# Altium PCB Силовая плата.PcbDoc (part 1 of 2)
Units mm, origin at the board's own origin, x right, y up, seen from the top; angles counter-clockwise.
Board outline 67 x 90.45 mm, 6 copper layers (F.Cu, In1.Cu, In2.Cu, In3.Cu, In4.Cu, B.Cu); 79 components, 15 nets, 212 pads, 347 vias.
Unrouted connection lines stored in the file: 1.
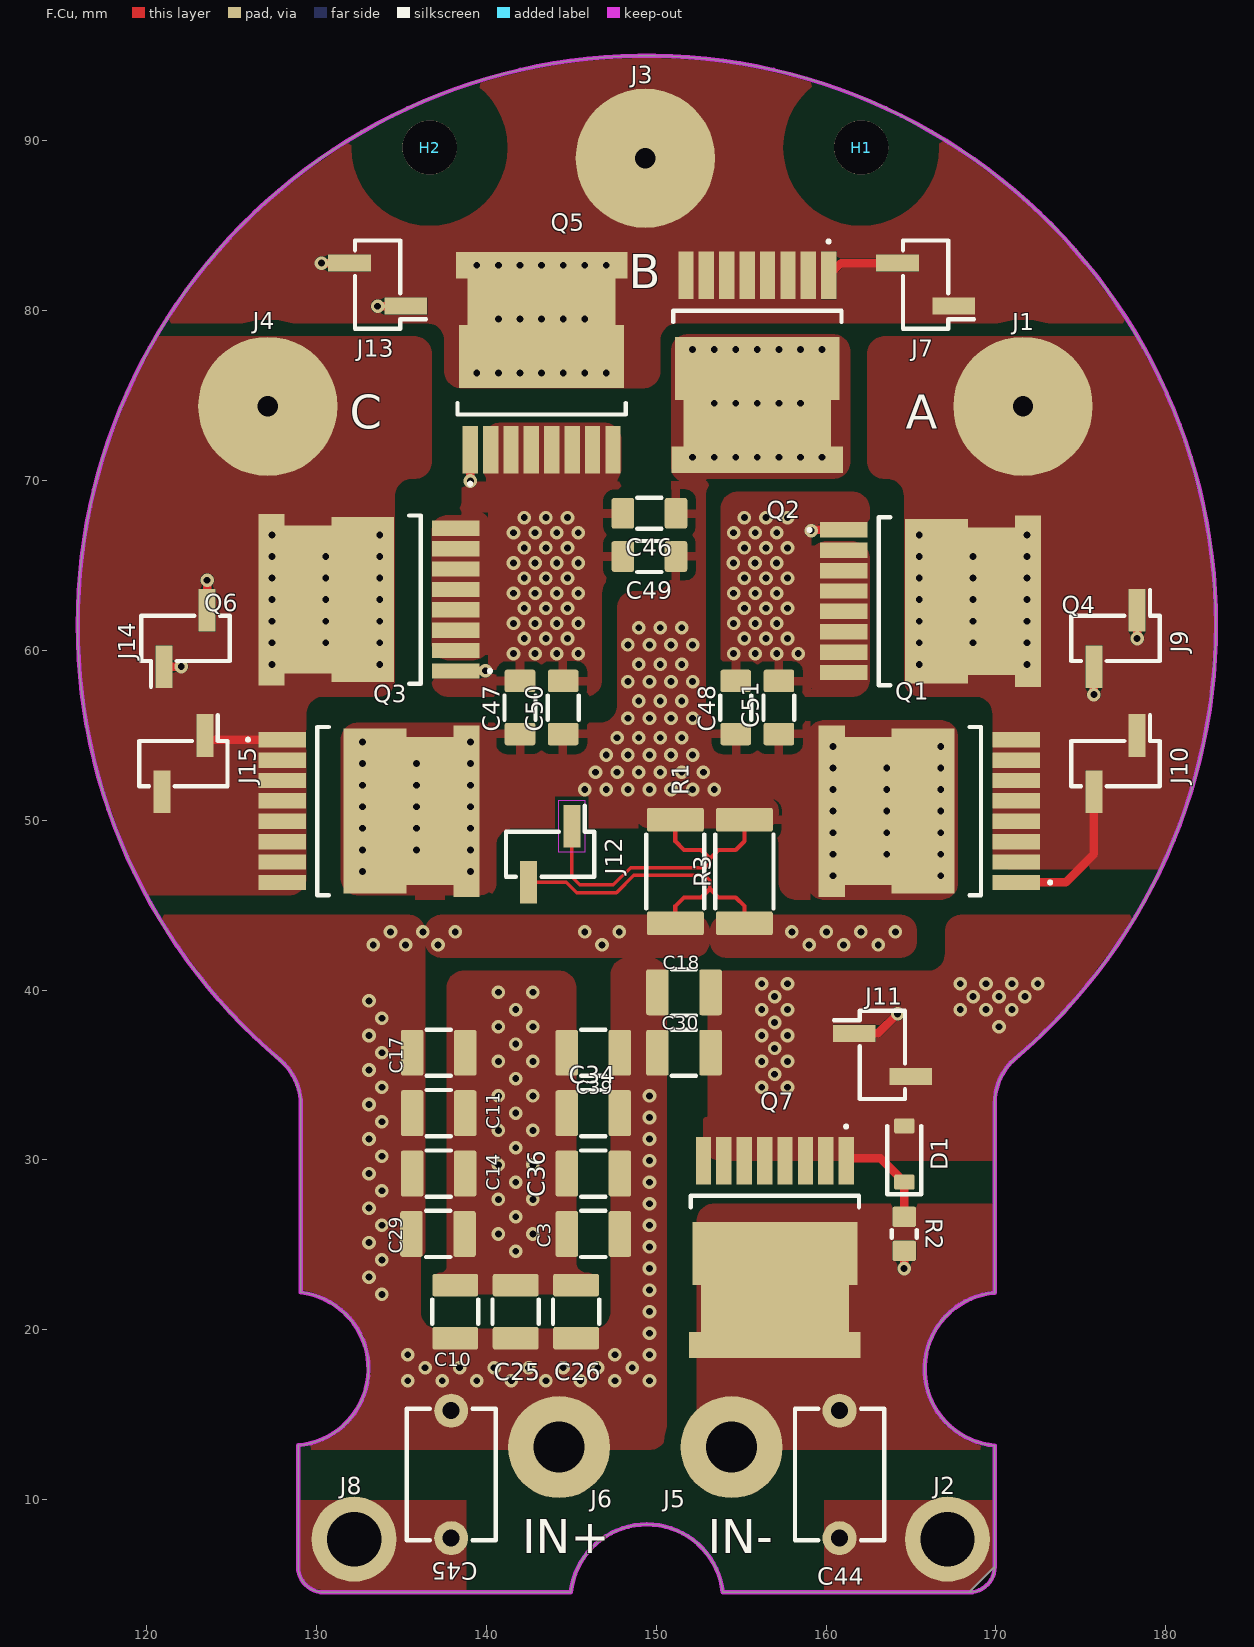
[diagram p0: F.Cu view]
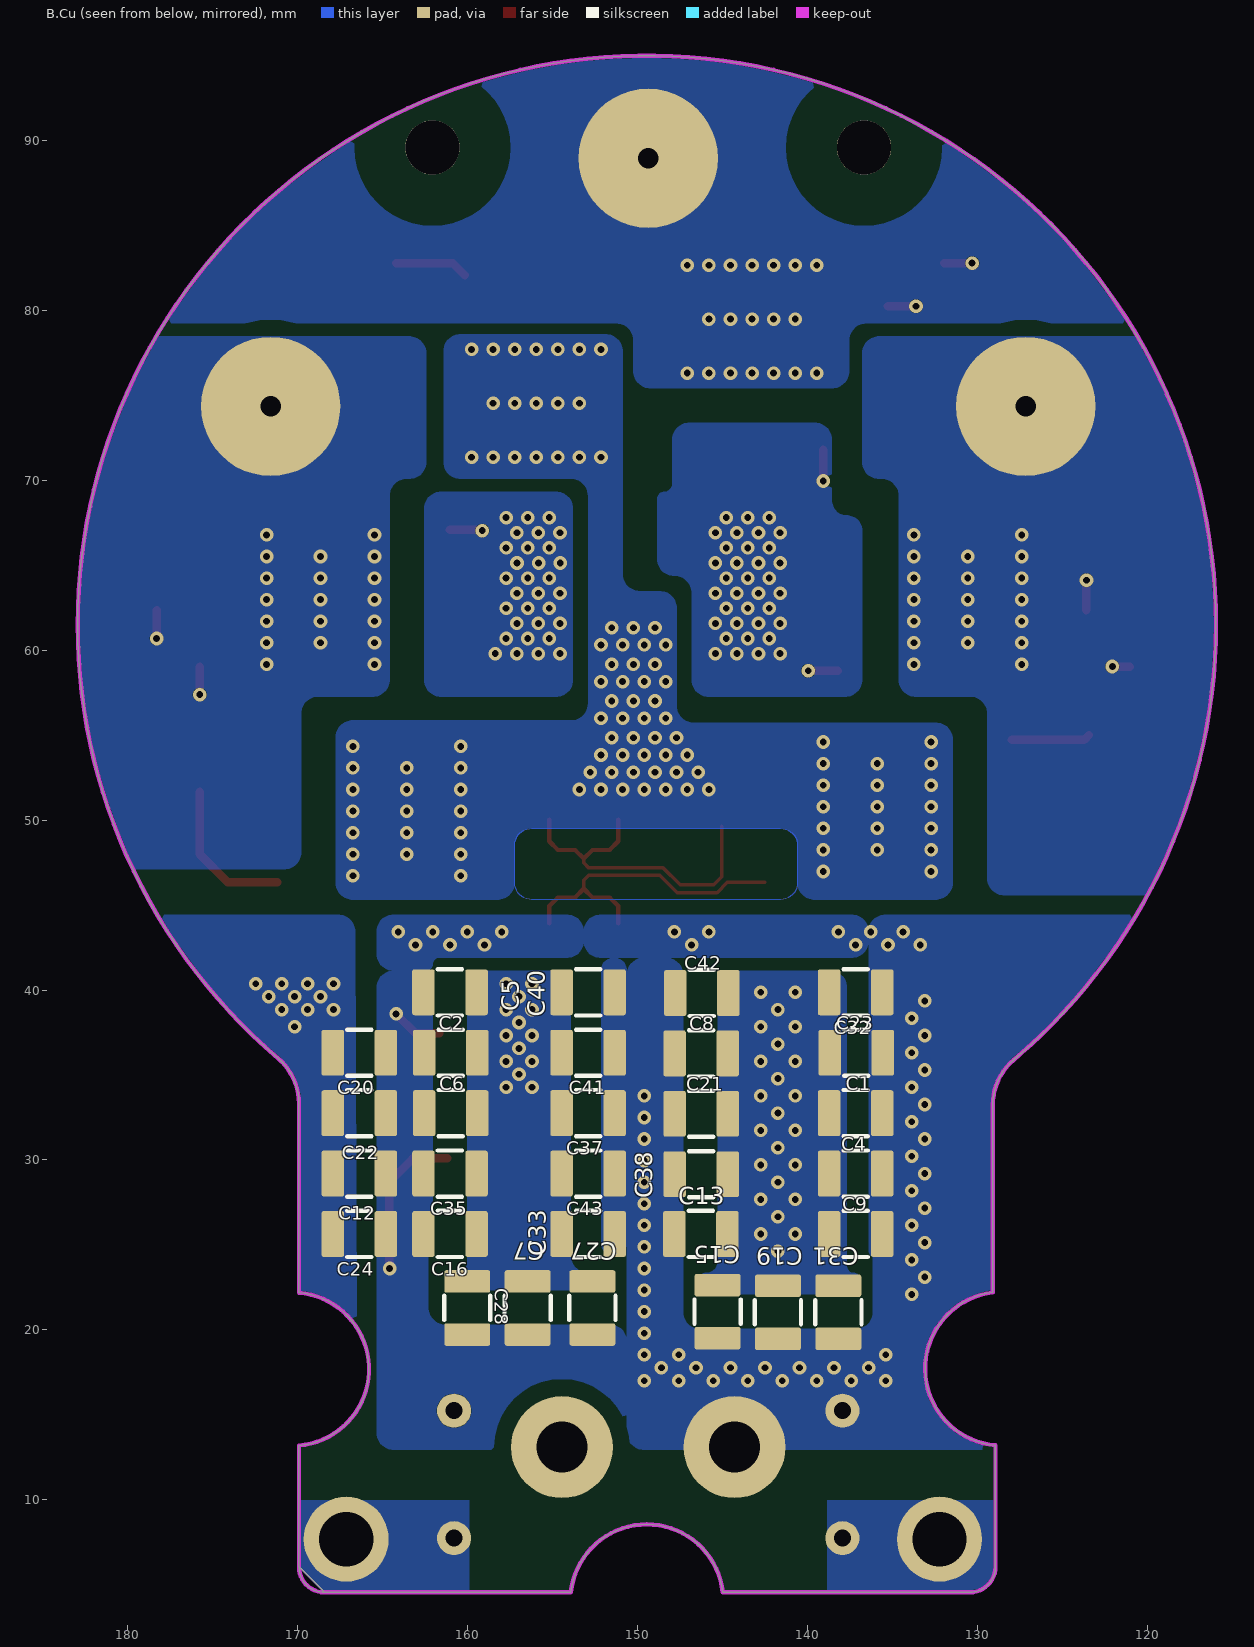
[diagram p1: B.Cu view, seen from below]
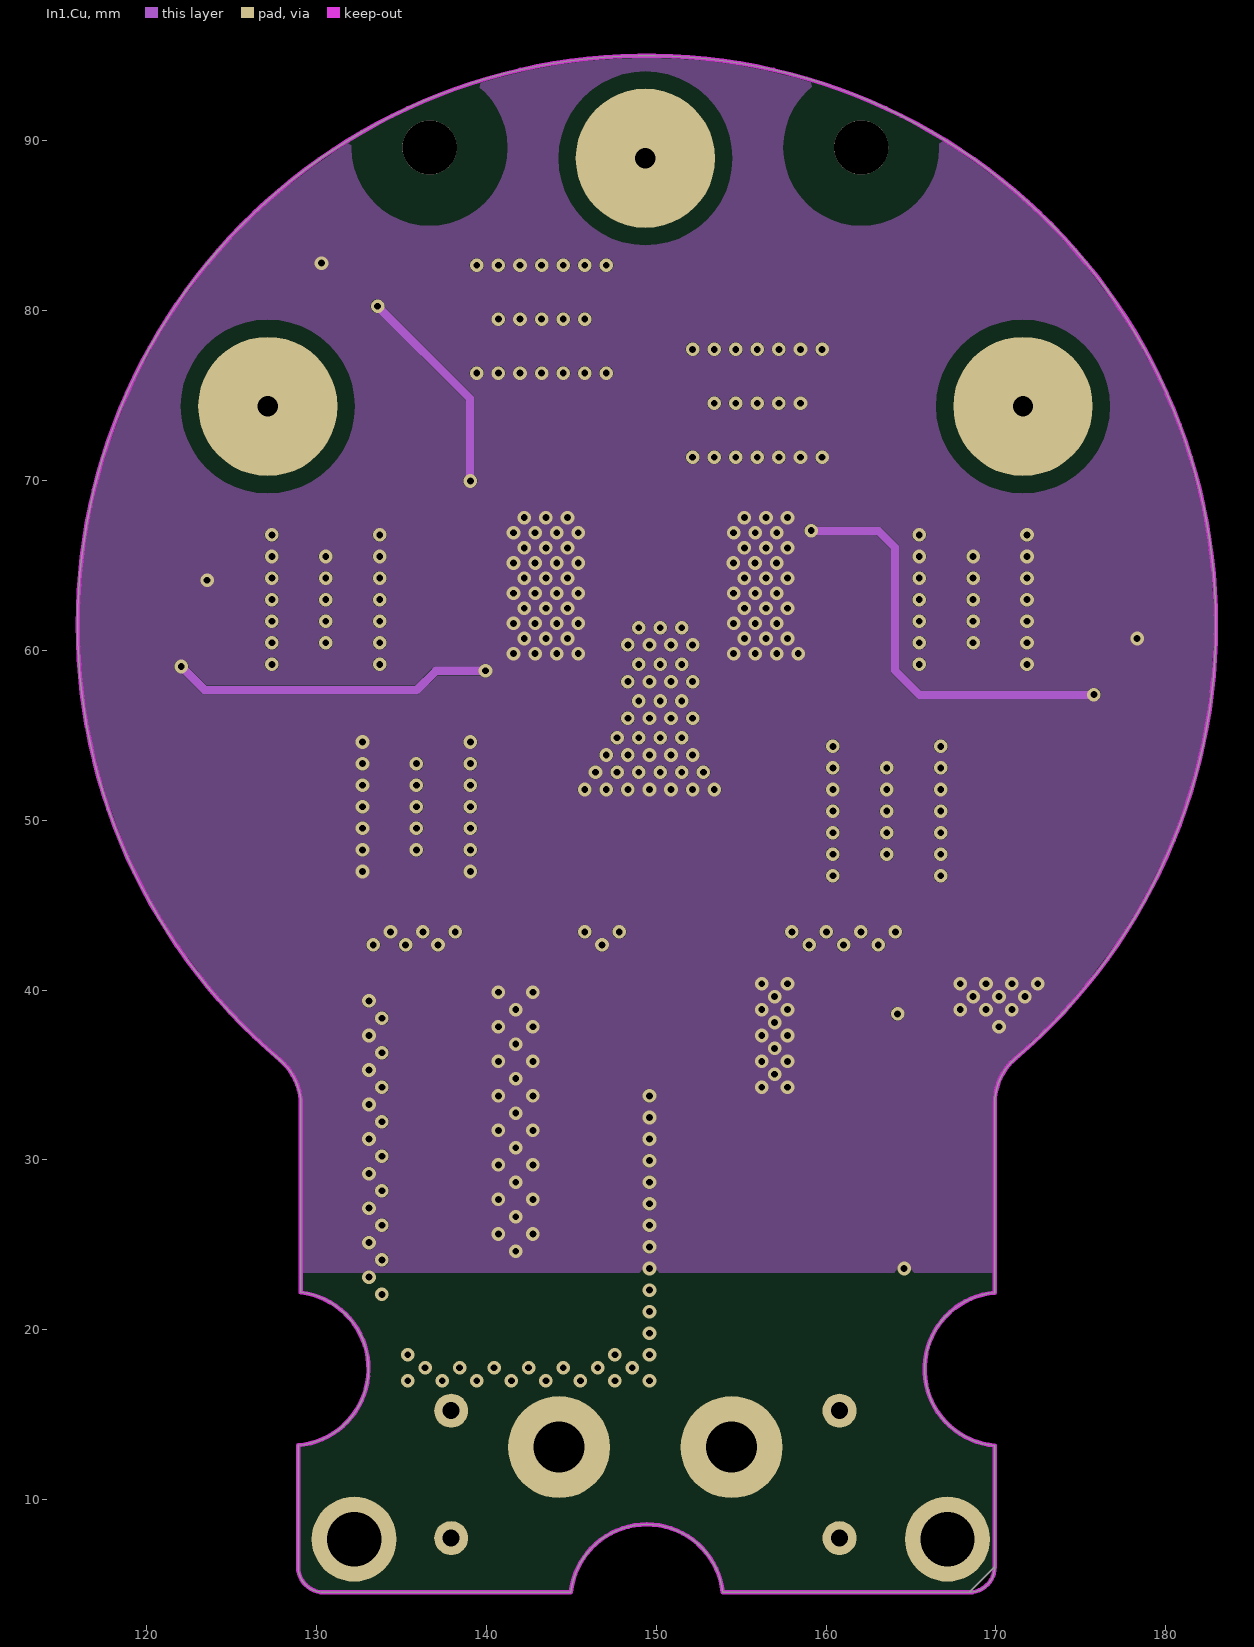
[diagram p2: In1.Cu]
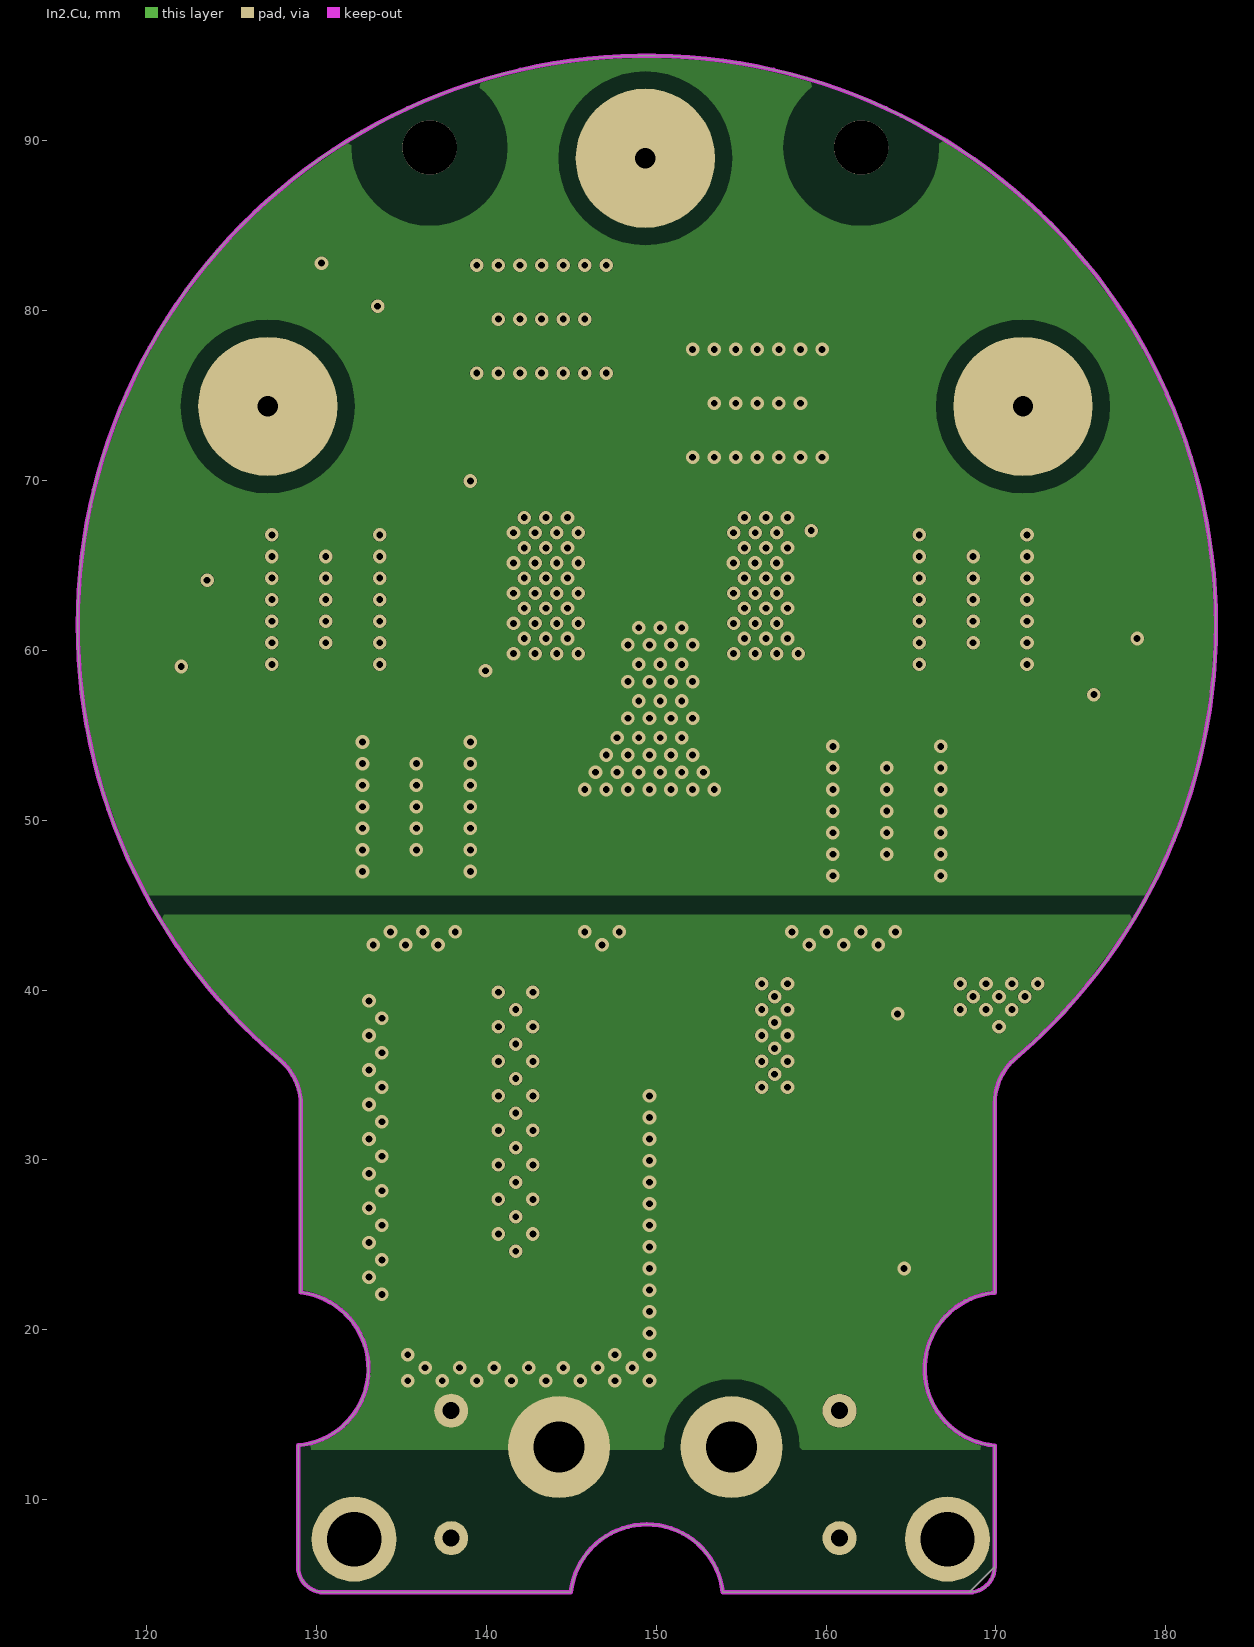
[diagram p3: In2.Cu]
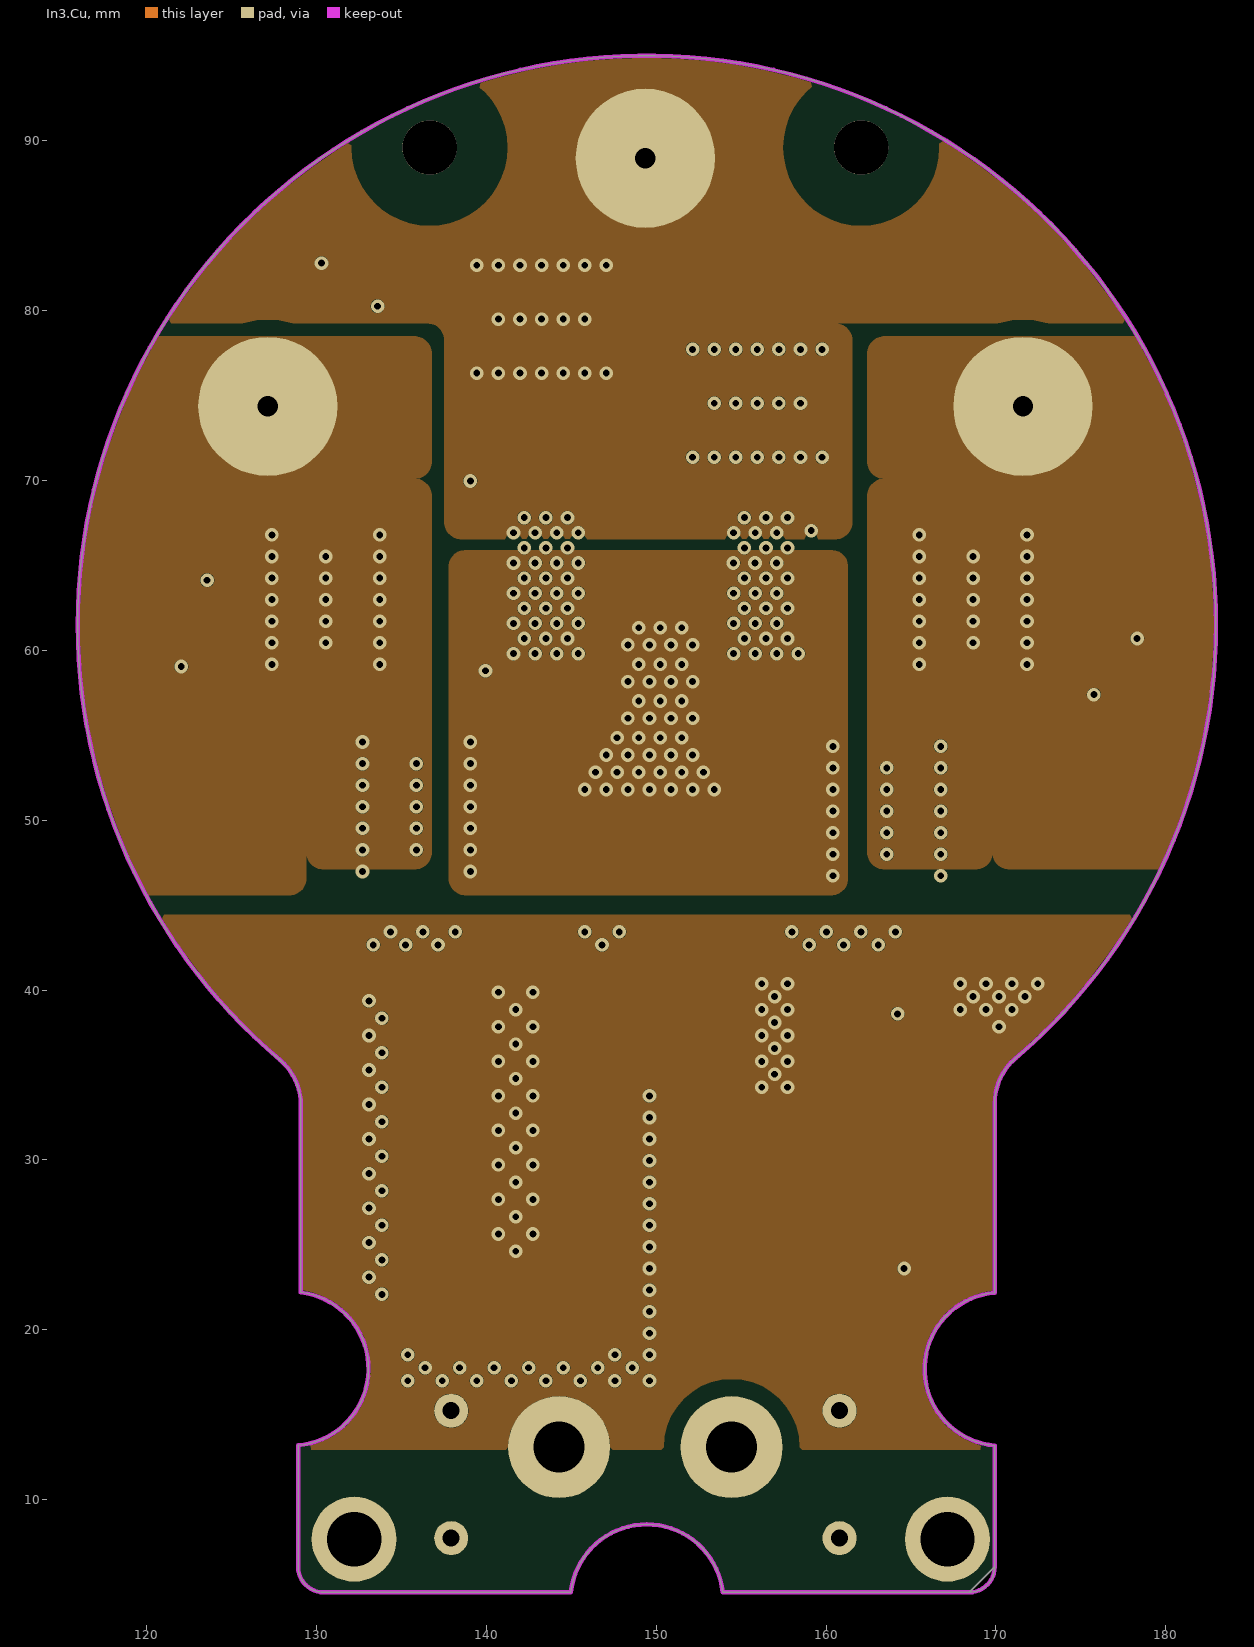
[diagram p4: In3.Cu]
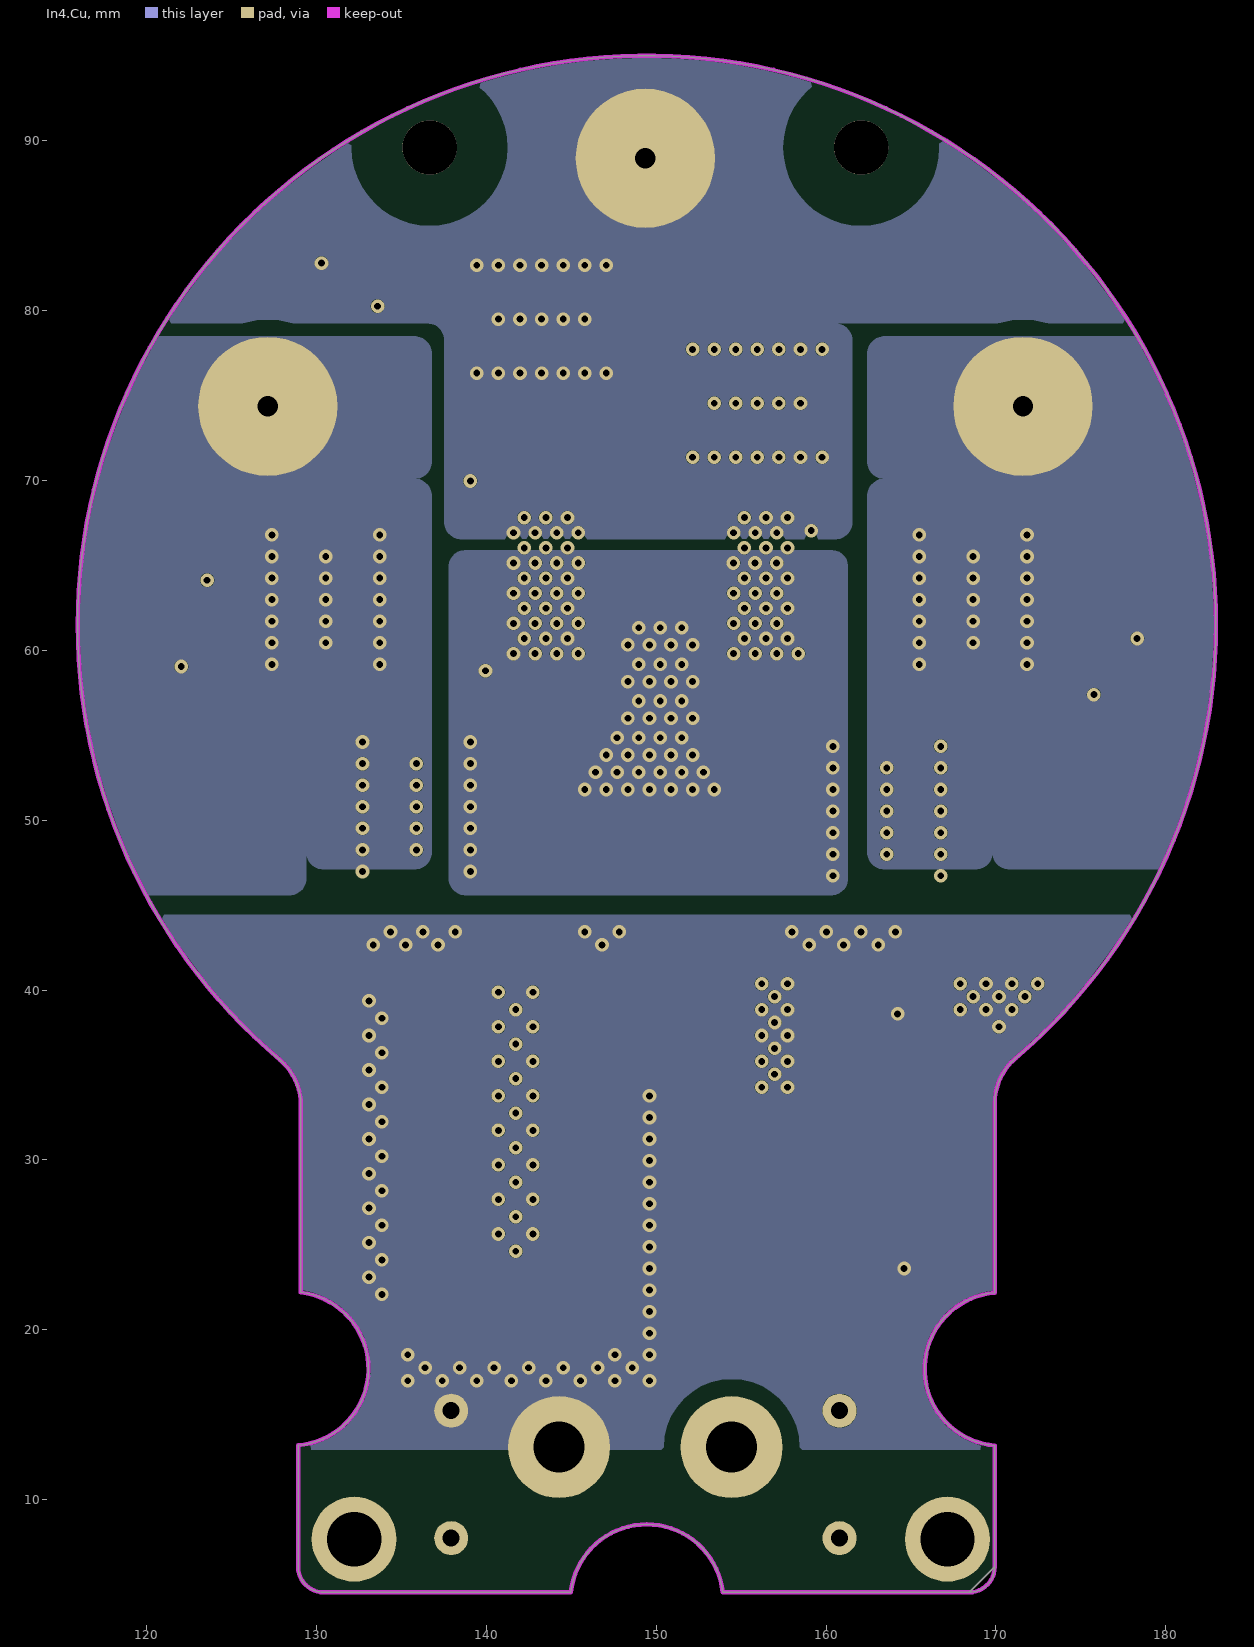
[diagram p5: In4.Cu]

## Layer stack, top to bottom
F.Mask: solder mask 0.0102, Solder Resist, Dk 3.5
F.Cu: signal copper 0.0356
Dielectric 1: dielectric 0.32, FR-4, Dk 4.8
In1.Cu: signal copper 0.0356
Dielectric2: dielectric 0.32, FR-4, Dk 4.8
In2.Cu: signal copper 0.0356
Dielectric3: dielectric 0.32, FR-4, Dk 4.8
In3.Cu: signal copper 0.0356
Dielectric4: dielectric 0.32, FR-4, Dk 4.8
In4.Cu: signal copper 0.0356
Dielectric5: dielectric 0.32, FR-4, Dk 4.8
B.Cu: signal copper 0.0356
B.Mask: solder mask 0.0102, Solder Resist, Dk 3.5

## Board outline
168.428,4.55 ccw(c168.428,6.05) 169.928,6.05 169.927,13.187 cw(c170.317,17.686) 169.927,22.185 169.927,33.322 cw(c173.428,33.322) 171.159,35.988 ccw(c149.45,61.502) 182.951,61.502 ccw(c149.451,61.502) 115.951,61.502 ccw(c149.45,61.502) 127.848,35.898 cw(c125.585,33.222) 129.09,33.22 129.09,22.201 cw(c128.543,17.71) 128.928,13.203 128.928,6.05 ccw(c130.428,6.05) 130.428,4.55 144.979,4.553 cw(c149.451,4.05) 153.922,4.552 168.428,4.55 ccw(c168.428,6.05) 168.428,4.55

## Design rules (kind name [scope] priority, off if disabled: settings)
Clearance "Clearence 3_PadClass" [InPadClass('Pad Class Clearance 3')] p1: gap=3 ignorepadtopadclearanceinfootprint=FALSE
Clearance "Clearence 1_PadClass" [InPadClass('Pad Class Clearance 1')] p2: gap=1 ignorepadtopadclearanceinfootprint=FALSE
MinimumSolderMaskSliver [All] p1: minsoldermaskwidth=0
PolygonConnect Polygon_B.Cu-Shunt--1_ConnectDirect [IsNamedPolygon('B.Cu-Shunt--1')] p1: connectstyle=Direct reliefconductorwidth=0.254 reliefentries=4 polygonreliefangle="90 Angle" airgapwidth=0.254
PolygonConnect Polygon_B.Cu-GND-4_ConnectDirect [IsNamedPolygon('B.Cu-GND-4')] p2: connectstyle=Direct reliefconductorwidth=0.254 reliefentries=4 polygonreliefangle="90 Angle" airgapwidth=0.254
PolygonConnect Polygon_B.Cu-Shunt+-4_ConnectDirect [IsNamedPolygon('B.Cu-Shunt+-4')] p3: connectstyle=Direct reliefconductorwidth=0.254 reliefentries=4 polygonreliefangle="90 Angle" airgapwidth=0.254
PolygonConnect Polygon_B.Cu-Shunt+-3_ConnectDirect [IsNamedPolygon('B.Cu-Shunt+-3')] p4: connectstyle=Direct reliefconductorwidth=0.254 reliefentries=4 polygonreliefangle="90 Angle" airgapwidth=0.254
PolygonConnect Polygon_B.Cu-GND-3_ConnectDirect [IsNamedPolygon('B.Cu-GND-3')] p5: connectstyle=Direct reliefconductorwidth=0.254 reliefentries=4 polygonreliefangle="90 Angle" airgapwidth=0.254
PolygonConnect Polygon_B.Cu-Shunt+-2_ConnectDirect [IsNamedPolygon('B.Cu-Shunt+-2')] p6: connectstyle=Direct reliefconductorwidth=0.254 reliefentries=4 polygonreliefangle="90 Angle" airgapwidth=0.254
PolygonConnect Polygon_In4.Cu-Shunt+_ConnectDirect [IsNamedPolygon('In4.Cu-Shunt+')] p7: connectstyle=Direct reliefconductorwidth=0.254 reliefentries=4 polygonreliefangle="90 Angle" airgapwidth=0.254
PolygonConnect Polygon_In4.Cu-B-1_ConnectDirect [IsNamedPolygon('In4.Cu-B-1')] p8: connectstyle=Direct reliefconductorwidth=0.254 reliefentries=4 polygonreliefangle="90 Angle" airgapwidth=0.254
PolygonConnect Polygon_In3.Cu-B-1_ConnectDirect [IsNamedPolygon('In3.Cu-B-1')] p9: connectstyle=Direct reliefconductorwidth=0.254 reliefentries=4 polygonreliefangle="90 Angle" airgapwidth=0.254
PolygonConnect Polygon_In4.Cu-Shunt-_ConnectDirect [IsNamedPolygon('In4.Cu-Shunt-')] p10: connectstyle=Direct reliefconductorwidth=0.254 reliefentries=4 polygonreliefangle="90 Angle" airgapwidth=0.254
PolygonConnect Polygon_In3.Cu-Shunt-_ConnectDirect [IsNamedPolygon('In3.Cu-Shunt-')] p11: connectstyle=Direct reliefconductorwidth=0.254 reliefentries=4 polygonreliefangle="90 Angle" airgapwidth=0.254
PolygonConnect Polygon_In4.Cu-A-1_ConnectDirect [IsNamedPolygon('In4.Cu-A-1')] p12: connectstyle=Direct reliefconductorwidth=0.254 reliefentries=4 polygonreliefangle="90 Angle" airgapwidth=0.254
PolygonConnect Polygon_In3.Cu-A-1_ConnectDirect [IsNamedPolygon('In3.Cu-A-1')] p13: connectstyle=Direct reliefconductorwidth=0.254 reliefentries=4 polygonreliefangle="90 Angle" airgapwidth=0.254
PolygonConnect Polygon_In4.Cu-C-1_ConnectDirect [IsNamedPolygon('In4.Cu-C-1')] p14: connectstyle=Direct reliefconductorwidth=0.254 reliefentries=4 polygonreliefangle="90 Angle" airgapwidth=0.254
PolygonConnect Polygon_In3.Cu-C-1_ConnectDirect [IsNamedPolygon('In3.Cu-C-1')] p15: connectstyle=Direct reliefconductorwidth=0.254 reliefentries=4 polygonreliefangle="90 Angle" airgapwidth=0.254
PolygonConnect Polygon_In3.Cu-GND_ConnectDirect [IsNamedPolygon('In3.Cu-GND')] p16: connectstyle=Direct reliefconductorwidth=0.254 reliefentries=4 polygonreliefangle="90 Angle" airgapwidth=0.254
PolygonConnect Polygon_In2.Cu-Shunt-_ConnectDirect [IsNamedPolygon('In2.Cu-Shunt-') vs IsVia] p17: connectstyle=Direct reliefconductorwidth=0.254 reliefentries=4 polygonreliefangle="90 Angle" airgapwidth=0.254
PolygonConnect Polygon_In2.Cu-Shunt-_ConnectRelief45 [IsNamedPolygon('In2.Cu-Shunt-') vs (IsThruPin or IsSMTPin) and (PadShape_AllLayers = 'Round')] p18: connectstyle=Relief reliefconductorwidth=0.5 reliefentries=4 polygonreliefangle="45 Angle" airgapwidth=0.5
PolygonConnect Polygon_In2.Cu-Shunt-_ConnectRelief90 [IsNamedPolygon('In2.Cu-Shunt-') vs (IsThruPin or IsSMTPin) and (PadShape_AllLayers <> 'Round')] p19: connectstyle=Relief reliefconductorwidth=0.5 reliefentries=4 polygonreliefangle="90 Angle" airgapwidth=0.5
PolygonConnect Polygon_In2.Cu-Shunt+_ConnectDirect [IsNamedPolygon('In2.Cu-Shunt+')] p20: connectstyle=Direct reliefconductorwidth=0.254 reliefentries=4 polygonreliefangle="90 Angle" airgapwidth=0.254
PolygonConnect Polygon_In1.Cu-GND_ConnectDirect [IsNamedPolygon('In1.Cu-GND')] p21: connectstyle=Direct reliefconductorwidth=0.254 reliefentries=4 polygonreliefangle="90 Angle" airgapwidth=0.254
PolygonConnect Polygon_B.Cu-Shunt+-1_ConnectDirect [IsNamedPolygon('B.Cu-Shunt+-1')] p22: connectstyle=Direct reliefconductorwidth=0.254 reliefentries=4 polygonreliefangle="90 Angle" airgapwidth=0.254
PolygonConnect Polygon_F.Cu-Shunt+-2_ConnectDirect [IsNamedPolygon('F.Cu-Shunt+-2')] p23: connectstyle=Direct reliefconductorwidth=0.254 reliefentries=4 polygonreliefangle="90 Angle" airgapwidth=0.254
PolygonConnect Polygon_B.Cu-Earth_Protective-1_ConnectDirect [IsNamedPolygon('B.Cu-Earth_Protective-1')] p24: connectstyle=Direct reliefconductorwidth=0.254 reliefentries=4 polygonreliefangle="90 Angle" airgapwidth=0.254
PolygonConnect Polygon_F.Cu-Earth_Protective-1_ConnectDirect [IsNamedPolygon('F.Cu-Earth_Protective-1')] p25: connectstyle=Direct reliefconductorwidth=0.254 reliefentries=4 polygonreliefangle="90 Angle" airgapwidth=0.254
PolygonConnect Polygon_B.Cu-GND-2_ConnectDirect [IsNamedPolygon('B.Cu-GND-2') vs IsVia] p26: connectstyle=Direct reliefconductorwidth=0.254 reliefentries=4 polygonreliefangle="90 Angle" airgapwidth=0.254
PolygonConnect Polygon_B.Cu-GND-2_ConnectRelief45 [IsNamedPolygon('B.Cu-GND-2') vs (IsThruPin or IsSMTPin) and (PadShape_AllLayers = 'Round')] p27: connectstyle=Relief reliefconductorwidth=0.5 reliefentries=4 polygonreliefangle="45 Angle" airgapwidth=0.5
PolygonConnect Polygon_B.Cu-GND-2_ConnectRelief90 [IsNamedPolygon('B.Cu-GND-2') vs (IsThruPin or IsSMTPin) and (PadShape_AllLayers <> 'Round')] p28: connectstyle=Relief reliefconductorwidth=0.5 reliefentries=4 polygonreliefangle="90 Angle" airgapwidth=0.5
PolygonConnect Polygon_F.Cu-GND-6_ConnectDirect [IsNamedPolygon('F.Cu-GND-6') vs IsVia] p29: connectstyle=Direct reliefconductorwidth=0.254 reliefentries=4 polygonreliefangle="90 Angle" airgapwidth=0.254
PolygonConnect Polygon_F.Cu-GND-6_ConnectRelief45 [IsNamedPolygon('F.Cu-GND-6') vs (IsThruPin or IsSMTPin) and (PadShape_AllLayers = 'Round')] p30: connectstyle=Relief reliefconductorwidth=0.5 reliefentries=4 polygonreliefangle="45 Angle" airgapwidth=0.5
PolygonConnect Polygon_F.Cu-GND-6_ConnectRelief90 [IsNamedPolygon('F.Cu-GND-6') vs (IsThruPin or IsSMTPin) and (PadShape_AllLayers <> 'Round')] p31: connectstyle=Relief reliefconductorwidth=0.5 reliefentries=4 polygonreliefangle="90 Angle" airgapwidth=0.5
PolygonConnect Polygon_B.Cu-GND-1_ConnectDirect [IsNamedPolygon('B.Cu-GND-1')] p32: connectstyle=Direct reliefconductorwidth=0.254 reliefentries=4 polygonreliefangle="90 Angle" airgapwidth=0.254
PolygonConnect Polygon_F.Cu-GND-5_ConnectDirect [IsNamedPolygon('F.Cu-GND-5')] p33: connectstyle=Direct reliefconductorwidth=0.254 reliefentries=4 polygonreliefangle="90 Angle" airgapwidth=0.254
PolygonConnect Polygon_B.Cu-Shunt-_ConnectDirect [IsNamedPolygon('B.Cu-Shunt-') vs IsVia] p34: connectstyle=Direct reliefconductorwidth=0.254 reliefentries=4 polygonreliefangle="90 Angle" airgapwidth=0.254
PolygonConnect Polygon_B.Cu-Shunt-_ConnectRelief45 [IsNamedPolygon('B.Cu-Shunt-') vs (IsThruPin or IsSMTPin) and (PadShape_AllLayers = 'Round')] p35: connectstyle=Relief reliefconductorwidth=0.5 reliefentries=4 polygonreliefangle="45 Angle" airgapwidth=0.5
PolygonConnect Polygon_B.Cu-Shunt-_ConnectRelief90 [IsNamedPolygon('B.Cu-Shunt-') vs (IsThruPin or IsSMTPin) and (PadShape_AllLayers <> 'Round')] p36: connectstyle=Relief reliefconductorwidth=0.5 reliefentries=4 polygonreliefangle="90 Angle" airgapwidth=0.5
PolygonConnect Polygon_F.Cu-Shunt--4_ConnectDirect [IsNamedPolygon('F.Cu-Shunt--4') vs IsVia] p37: connectstyle=Direct reliefconductorwidth=0.254 reliefentries=4 polygonreliefangle="90 Angle" airgapwidth=0.254
PolygonConnect Polygon_F.Cu-Shunt--4_ConnectRelief45 [IsNamedPolygon('F.Cu-Shunt--4') vs (IsThruPin or IsSMTPin) and (PadShape_AllLayers = 'Round')] p38: connectstyle=Relief reliefconductorwidth=0.5 reliefentries=4 polygonreliefangle="45 Angle" airgapwidth=0.5
PolygonConnect Polygon_F.Cu-Shunt--4_ConnectRelief90 [IsNamedPolygon('F.Cu-Shunt--4') vs (IsThruPin or IsSMTPin) and (PadShape_AllLayers <> 'Round')] p39: connectstyle=Relief reliefconductorwidth=0.5 reliefentries=4 polygonreliefangle="90 Angle" airgapwidth=0.5
PolygonConnect Polygon_B.Cu-Shunt+_ConnectDirect [IsNamedPolygon('B.Cu-Shunt+')] p40: connectstyle=Direct reliefconductorwidth=0.254 reliefentries=4 polygonreliefangle="90 Angle" airgapwidth=0.254
PolygonConnect Polygon_F.Cu-Shunt+-1_ConnectDirect [IsNamedPolygon('F.Cu-Shunt+-1')] p41: connectstyle=Direct reliefconductorwidth=0.254 reliefentries=4 polygonreliefangle="90 Angle" airgapwidth=0.254
PolygonConnect Polygon_B.Cu-GND_ConnectDirect [IsNamedPolygon('B.Cu-GND') vs IsVia] p42: connectstyle=Direct reliefconductorwidth=0.254 reliefentries=4 polygonreliefangle="90 Angle" airgapwidth=0.254
PolygonConnect Polygon_B.Cu-GND_ConnectRelief45 [IsNamedPolygon('B.Cu-GND') vs (IsThruPin or IsSMTPin) and (PadShape_AllLayers = 'Round')] p43: connectstyle=Relief reliefconductorwidth=0.5 reliefentries=4 polygonreliefangle="45 Angle" airgapwidth=0.5
PolygonConnect Polygon_B.Cu-GND_ConnectRelief90 [IsNamedPolygon('B.Cu-GND') vs (IsThruPin or IsSMTPin) and (PadShape_AllLayers <> 'Round')] p44: connectstyle=Relief reliefconductorwidth=0.5 reliefentries=4 polygonreliefangle="90 Angle" airgapwidth=0.5
PolygonConnect Polygon_F.Cu-GND-4_ConnectDirect [IsNamedPolygon('F.Cu-GND-4') vs IsVia] p45: connectstyle=Direct reliefconductorwidth=0.254 reliefentries=4 polygonreliefangle="90 Angle" airgapwidth=0.254
PolygonConnect Polygon_F.Cu-GND-4_ConnectRelief45 [IsNamedPolygon('F.Cu-GND-4') vs (IsThruPin or IsSMTPin) and (PadShape_AllLayers = 'Round')] p46: connectstyle=Relief reliefconductorwidth=0.5 reliefentries=4 polygonreliefangle="45 Angle" airgapwidth=0.5
PolygonConnect Polygon_F.Cu-GND-4_ConnectRelief90 [IsNamedPolygon('F.Cu-GND-4') vs (IsThruPin or IsSMTPin) and (PadShape_AllLayers <> 'Round')] p47: connectstyle=Relief reliefconductorwidth=0.5 reliefentries=4 polygonreliefangle="90 Angle" airgapwidth=0.5
PolygonConnect Polygon_B.Cu-Earth_Protective_ConnectDirect [IsNamedPolygon('B.Cu-Earth_Protective')] p48: connectstyle=Direct reliefconductorwidth=0.254 reliefentries=4 polygonreliefangle="90 Angle" airgapwidth=0.254
PolygonConnect Polygon_F.Cu-Earth_Protective_ConnectDirect [IsNamedPolygon('F.Cu-Earth_Protective')] p49: connectstyle=Direct reliefconductorwidth=0.254 reliefentries=4 polygonreliefangle="90 Angle" airgapwidth=0.254
PolygonConnect Polygon_B.Cu-A_ConnectDirect [IsNamedPolygon('B.Cu-A')] p50: connectstyle=Direct reliefconductorwidth=0.254 reliefentries=4 polygonreliefangle="90 Angle" airgapwidth=0.254
PolygonConnect Polygon_In4.Cu-A_ConnectDirect [IsNamedPolygon('In4.Cu-A')] p51: connectstyle=Direct reliefconductorwidth=0.254 reliefentries=4 polygonreliefangle="90 Angle" airgapwidth=0.254
PolygonConnect Polygon_In3.Cu-A_ConnectDirect [IsNamedPolygon('In3.Cu-A')] p52: connectstyle=Direct reliefconductorwidth=0.254 reliefentries=4 polygonreliefangle="90 Angle" airgapwidth=0.254
PolygonConnect Polygon_F.Cu-A_ConnectDirect [IsNamedPolygon('F.Cu-A')] p53: connectstyle=Direct reliefconductorwidth=0.254 reliefentries=4 polygonreliefangle="90 Angle" airgapwidth=0.254
PolygonConnect Polygon_B.Cu-C_ConnectDirect [IsNamedPolygon('B.Cu-C')] p54: connectstyle=Direct reliefconductorwidth=0.254 reliefentries=4 polygonreliefangle="90 Angle" airgapwidth=0.254
PolygonConnect Polygon_In4.Cu-C_ConnectDirect [IsNamedPolygon('In4.Cu-C')] p55: connectstyle=Direct reliefconductorwidth=0.254 reliefentries=4 polygonreliefangle="90 Angle" airgapwidth=0.254
PolygonConnect Polygon_In3.Cu-C_ConnectDirect [IsNamedPolygon('In3.Cu-C')] p56: connectstyle=Direct reliefconductorwidth=0.254 reliefentries=4 polygonreliefangle="90 Angle" airgapwidth=0.254
PolygonConnect Polygon_F.Cu-C_ConnectDirect [IsNamedPolygon('F.Cu-C')] p57: connectstyle=Direct reliefconductorwidth=0.254 reliefentries=4 polygonreliefangle="90 Angle" airgapwidth=0.254
PolygonConnect Polygon_B.Cu-B_ConnectDirect [IsNamedPolygon('B.Cu-B')] p58: connectstyle=Direct reliefconductorwidth=0.254 reliefentries=4 polygonreliefangle="90 Angle" airgapwidth=0.254
PolygonConnect Polygon_In4.Cu-B_ConnectDirect [IsNamedPolygon('In4.Cu-B')] p59: connectstyle=Direct reliefconductorwidth=0.254 reliefentries=4 polygonreliefangle="90 Angle" airgapwidth=0.254
PolygonConnect Polygon_In3.Cu-B_ConnectDirect [IsNamedPolygon('In3.Cu-B')] p60: connectstyle=Direct reliefconductorwidth=0.254 reliefentries=4 polygonreliefangle="90 Angle" airgapwidth=0.254
PolygonConnect Polygon_F.Cu-B_ConnectDirect [IsNamedPolygon('F.Cu-B')] p61: connectstyle=Direct reliefconductorwidth=0.254 reliefentries=4 polygonreliefangle="90 Angle" airgapwidth=0.254
PolygonConnect Polygon_F.Cu-Shunt--3_ConnectDirect [IsNamedPolygon('F.Cu-Shunt--3')] p62: connectstyle=Direct reliefconductorwidth=0.254 reliefentries=4 polygonreliefangle="90 Angle" airgapwidth=0.254
PolygonConnect Polygon_F.Cu-Shunt--2_ConnectDirect [IsNamedPolygon('F.Cu-Shunt--2')] p63: connectstyle=Direct reliefconductorwidth=0.254 reliefentries=4 polygonreliefangle="90 Angle" airgapwidth=0.254
PolygonConnect Polygon_F.Cu-Shunt--1_ConnectDirect [IsNamedPolygon('F.Cu-Shunt--1')] p64: connectstyle=Direct reliefconductorwidth=0.254 reliefentries=4 polygonreliefangle="90 Angle" airgapwidth=0.254
PolygonConnect Polygon_F.Cu-GND-3_ConnectDirect [IsNamedPolygon('F.Cu-GND-3')] p65: connectstyle=Direct reliefconductorwidth=0.254 reliefentries=4 polygonreliefangle="90 Angle" airgapwidth=0.254
PolygonConnect Polygon_F.Cu-Net-(J5-Pin_1)_ConnectDirect [IsNamedPolygon('F.Cu-Net-(J5-Pin_1)')] p66: connectstyle=Direct reliefconductorwidth=0.254 reliefentries=4 polygonreliefangle="90 Angle" airgapwidth=0.254
PolygonConnect Polygon_F.Cu-GND-2_ConnectDirect [IsNamedPolygon('F.Cu-GND-2')] p67: connectstyle=Direct reliefconductorwidth=0.254 reliefentries=4 polygonreliefangle="90 Angle" airgapwidth=0.254
PolygonConnect Polygon_F.Cu-Shunt-_ConnectDirect [IsNamedPolygon('F.Cu-Shunt-')] p68: connectstyle=Direct reliefconductorwidth=0.254 reliefentries=4 polygonreliefangle="90 Angle" airgapwidth=0.254
PolygonConnect Polygon_F.Cu-Shunt+_ConnectDirect [IsNamedPolygon('F.Cu-Shunt+')] p69: connectstyle=Direct reliefconductorwidth=0.254 reliefentries=4 polygonreliefangle="90 Angle" airgapwidth=0.254
PolygonConnect Polygon_F.Cu-GND-1_ConnectDirect [IsNamedPolygon('F.Cu-GND-1')] p70: connectstyle=Direct reliefconductorwidth=0.254 reliefentries=4 polygonreliefangle="90 Angle" airgapwidth=0.254
PolygonConnect Polygon_F.Cu-GND_ConnectDirect [IsNamedPolygon('F.Cu-GND')] p71: connectstyle=Direct reliefconductorwidth=0.254 reliefentries=4 polygonreliefangle="90 Angle" airgapwidth=0.254
RoutingVias [All] p1: holewidth=0.711 width=1.27 viastyle="Through Hole" minholewidth=0.711 minwidth=1.27 maxholewidth=0.711 maxwidth=1.27
SilkToSilkClearance [All] p1: silktosilkclearance=0
SilkToSolderMaskClearance [IsPad] p1: minsilkscreentomaskgap=0 clearancetoexposedcopper=TRUE
SolderMaskExpansion [All] p1: expansion=0.102 istentingtop=FALSE
Width [All] p1: maxlimit=10 minlimit=0.254 preferedwidth=0.254 minimp=50.000000 maximp=50.000000 favimp=50.000000
27 further rules are at their usual default settings.

## Classes and differential pairs
pad class "Pad Class Clearance 3": H1-Un1 H2-Un1
pad class "Pad Class Clearance 1": J1-1 J3-1 J4-1 J5-1

## Components (designator, comment, footprint, x,y, rotation, side; value= is the part's Value field where it differs from the comment)
C1 "10u" C_1210_3225Metric_Pad1.33x2.70mm_HandSolder#1 137.16,32.755 r180 bottom
C2 "10u" C_1210_3225Metric_Pad1.33x2.70mm_HandSolder#1 160.998,36.311 r0 bottom
C3 "10u" C_1210_3225Metric_Pad1.33x2.70mm_HandSolder#2 146.304,25.643 r180 top
C4 "10u" C_1210_3225Metric_Pad1.33x2.70mm_HandSolder#1 137.16,29.199 r180 bottom
C5 "10u" C_1210_3225Metric_Pad1.33x2.70mm_HandSolder#1 161.036,39.867 r0 bottom
C6 "10u" C_1210_3225Metric_Pad1.33x2.70mm_HandSolder#1 160.998,32.755 r0 bottom
C7 "10u" C_1210_3225Metric_Pad1.33x2.70mm_HandSolder#1 156.464,21.286 r270 bottom
C8 "10u" C_1210_3225Metric_Pad1.33x2.70mm_HandSolder#1 146.252,36.272 r0 bottom
C9 "10u" C_1210_3225Metric_Pad1.33x2.70mm_HandSolder#1 137.16,25.643 r180 bottom
C10 "10u" C_1210_3225Metric_Pad1.33x2.70mm_HandSolder#2 138.176,21.071 r90 top
C11 "10u" C_1210_3225Metric_Pad1.33x2.70mm_HandSolder#2 137.198,32.755 r0 top
C12 "10u" C_1210_3225Metric_Pad1.33x2.70mm_HandSolder#1 166.37,29.199 r180 bottom
C13 "10u" C_1210_3225Metric_Pad1.33x2.70mm_HandSolder#1 146.266,25.643 r0 bottom
C14 "10u" C_1210_3225Metric_Pad1.33x2.70mm_HandSolder#2 137.198,29.199 r0 top
C15 "10u" C_1210_3225Metric_Pad1.33x2.70mm_HandSolder#1 145.288,21.071 r270 bottom
C16 "10u" C_1210_3225Metric_Pad1.33x2.70mm_HandSolder#1 161.036,25.643 r0 bottom
C17 "10u" C_1210_3225Metric_Pad1.33x2.70mm_HandSolder#2 137.198,36.311 r0 top
C18 "10u" C_1210_3225Metric_Pad1.33x2.70mm_HandSolder#2 151.638,39.867 r0 top
C19 "10u" C_1210_3225Metric_Pad1.33x2.70mm_HandSolder#1 141.732,21.032 r270 bottom
C20 "10u" C_1210_3225Metric_Pad1.33x2.70mm_HandSolder#1 166.37,36.311 r180 bottom
C21 "10u" C_1210_3225Metric_Pad1.33x2.70mm_HandSolder#1 146.252,32.716 r0 bottom
C22 "10u" C_1210_3225Metric_Pad1.33x2.70mm_HandSolder#1 166.37,32.755 r180 bottom
C23 "10u" C_1210_3225Metric_Pad1.33x2.70mm_HandSolder#1 137.122,36.311 r180 bottom
C24 "10u" C_1210_3225Metric_Pad1.33x2.70mm_HandSolder#1 166.37,25.643 r180 bottom
C25 "10u" C_1210_3225Metric_Pad1.33x2.70mm_HandSolder#2 141.732,21.071 r90 top
C26 "10u" C_1210_3225Metric_Pad1.33x2.70mm_HandSolder#2 145.288,21.071 r90 top
C27 "10u" C_1210_3225Metric_Pad1.33x2.70mm_HandSolder#1 152.654,21.286 r270 bottom
C28 "10u" C_1210_3225Metric_Pad1.33x2.70mm_HandSolder#1 160.02,21.286 r270 bottom
C29 "10u" C_1210_3225Metric_Pad1.33x2.70mm_HandSolder#2 137.16,25.643 r0 top
C30 "10u" C_1210_3225Metric_Pad1.33x2.70mm_HandSolder#2 151.638,36.311 r0 top
C31 "10u" C_1210_3225Metric_Pad1.33x2.70mm_HandSolder#1 138.176,21.032 r270 bottom
C32 "10u" C_1210_3225Metric_Pad1.33x2.70mm_HandSolder#1 137.16,39.867 r180 bottom
C33 "10u" C_1210_3225Metric_Pad1.33x2.70mm_HandSolder#1 152.908,25.643 r180 bottom
C34 "10u" C_1210_3225Metric_Pad1.33x2.70mm_HandSolder#2 146.304,32.755 r180 top
C35 "10u" C_1210_3225Metric_Pad1.33x2.70mm_HandSolder#1 161.036,29.199 r0 bottom
C36 "10u" C_1210_3225Metric_Pad1.33x2.70mm_HandSolder#2 146.304,29.199 r180 top
C37 "10u" C_1210_3225Metric_Pad1.33x2.70mm_HandSolder#1 152.908,32.755 r180 bottom
C38 "10u" C_1210_3225Metric_Pad1.33x2.70mm_HandSolder#1 146.252,29.16 r0 bottom
C39 "10u" C_1210_3225Metric_Pad1.33x2.70mm_HandSolder#2 146.304,36.311 r180 top
C40 "10u" C_1210_3225Metric_Pad1.33x2.70mm_HandSolder#1 152.908,39.867 r180 bottom
C41 "10u" C_1210_3225Metric_Pad1.33x2.70mm_HandSolder#1 152.908,36.311 r180 bottom
C42 "10u" C_1210_3225Metric_Pad1.33x2.70mm_HandSolder#1 146.214,39.828 r0 bottom
C43 "10u" C_1210_3225Metric_Pad1.33x2.70mm_HandSolder#1 152.908,29.199 r180 bottom
C44 "1500p" C_Disc_D7.5mm_W5.0mm_P7.50mm 160.797,7.738 r90 top
C45 "1500p" C_Disc_D7.5mm_W5.0mm_P7.50mm 137.937,15.238 r270 top
C46 "10u" C_1206_3216Metric_Pad1.33x1.80mm_HandSolder 149.606,68.061 r180 top
C47 "10u" C_1206_3216Metric_Pad1.33x1.80mm_HandSolder 141.986,56.631 r90 top
C48 "10u" C_1206_3216Metric_Pad1.33x1.80mm_HandSolder 154.686,56.631 r90 top
C49 "10u" C_1206_3216Metric_Pad1.33x1.80mm_HandSolder 149.606,65.521 r180 top
C50 "10u" C_1206_3216Metric_Pad1.33x1.80mm_HandSolder 144.526,56.631 r90 top
C51 "10u" C_1206_3216Metric_Pad1.33x1.80mm_HandSolder 157.226,56.631 r90 top
D1 "BZT52C10" D_SOD-123 164.607,30.35 r90 top
H1 "MountingHole" MountingHole_3.2mm_M3 162.067,89.593 r0 top
H2 "MountingHole" MountingHole_3.2mm_M3 136.667,89.593 r0 top
J1 "A" Power_Wire#1 171.592,86.545 r0 top
J2 "A" Power_Wire#2 167.147,7.678 r0 top
J3 "B" Power_Wire#1 149.367,101.15 r0 top
J4 "C" Power_Wire#1 127.142,86.545 r0 top
J5 "IN-" Power_Wire#3 159.527,13.093 r0 top
J6 "IN+" Power_Wire#4 139.842,13.093 r0 top
J7 "Conn_01x02_Pin" PinHeader_1x02_P2.54mm_Vertical_SMD_Pin1Left 165.862,81.523 r180 top
J8 "A" Power_Wire#2 132.222,7.678 r0 top
J9 "Conn_01x02_Pin" PinHeader_1x02_P2.54mm_Vertical_SMD_Pin1Left 177.038,60.695 r270 top
J10 "Conn_01x02_Pin" PinHeader_1x02_P2.54mm_Vertical_SMD_Pin1Left 177.038,53.329 r270 top
J11 "Conn_01x02_Pin" PinHeader_1x02_P2.54mm_Vertical_SMD_Pin1Left 163.322,36.184 r0 top
J12 "Conn_01x02_Pin" PinHeader_1x02_P2.54mm_Vertical_SMD_Pin1Left 143.764,47.995 r270 top
J13 "Conn_01x02_Pin" PinHeader_1x02_P2.54mm_Vertical_SMD_Pin1Left 133.604,81.523 r180 top
J14 "Conn_01x02_Pin" PinHeader_1x02_P2.54mm_Vertical_SMD_Pin1Left 122.301,60.695 r90 top
J15 "Conn_01x02_Pin" PinHeader_1x02_P2.54mm_Vertical_SMD_Pin1Left 122.174,53.329 r270 top
Q1 "2N7002" IPTG007N06NM5ATMA1 164.846,50.535 r90 top
Q2 "2N7002" IPTG007N06NM5ATMA1 155.956,75.718 r180 top
Q3 "2N7002" IPTG007N06NM5ATMA1 134.328,50.535 r270 top
Q4 "2N7002" IPTG007N06NM5ATMA1 167.381,62.889 r270 top
Q5 "2N7002" IPTG007N06NM5ATMA1 143.256,78.152 r0 top
Q6 "2N7002" IPTG007N06NM5ATMA1 131.864,62.981 r90 top
Q7 "BSS214NW" IPTG007N06NM5ATMA1 156.987,23.616 r180 top
R1 "PU2512FKGP60U5L" R_2512_6332Metric_Pad1.40x3.35mm_HandSolder 151.13,46.979 r90 top
R2 "100k" R_0805_2012Metric_Pad1.20x1.40mm_HandSolder 164.607,25.65 r270 top
R3 "PU2512FKGP60U5L" R_2512_6332Metric_Pad1.40x3.35mm_HandSolder 155.194,46.977 r90 top

## Footprints (in the part's own frame and the unit in brackets; to place one, negate y for a bottom-side part, rotate by r counter-clockwise, add the part's x,y. Pads: shape width x height; smd on the part's side, far side on the other; paste and mask are expansions set on the pad)
C_1206_3216Metric_Pad1.33x1.80mm_HandSolder [mm]
  rrect19% 1.325x1.8 smd mask+0: 1(-1.562,0) 2(1.562,0)
  silkscreen extent -0.71,-0.91 0.71,0.91
C_1210_3225Metric_Pad1.33x2.70mm_HandSolder#1 [mm]
  rrect19% 1.325x2.7 smd mask+0: 1(1.562,0) 2(-1.562,0)
  silkscreen extent -0.71,-1.36 0.71,1.36
C_1210_3225Metric_Pad1.33x2.70mm_HandSolder#2 [mm]
  rrect19% 1.325x2.7 smd mask+0: 1(-1.562,0) 2(1.562,0)
  silkscreen extent -0.71,-1.36 0.71,1.36
C_Disc_D7.5mm_W5.0mm_P7.50mm [mm]
  round 2 hole 1 paste-2539.97 mask+0: 1(0,0) 2(7.5,0)
  silkscreen extent -0.12,-2.62 7.62,2.62
D_SOD-123 [mm]
  rrect25% 0.9x1.2 smd mask+0: 1(-1.65,0) 2(1.65,0)
  silkscreen extent -2.36,-1 1.65,1
IPTG007N06NM5ATMA1 [mm]
  rect 0.9x2.8 smd mask+0: 1(-4.2,-6.345) 2(-3,-6.345) 2(-1.8,-6.345) 2(-0.6,-6.345) 2(0.6,-6.345) 2(1.8,-6.345) 2(3,-6.345) 2(4.2,-6.345)
  rect 10.1x1.55 smd mask+0: 3(0,4.505)
  rect 8.7x2.75 smd mask+0: 3(0,2.355)
  rect 9.7x3.7 smd mask+0: 3(0,-0.87)
  silkscreen extent -4.95,-8.4 4.95,-3.6
MountingHole_3.2mm_M3 [mm]
  round 3.2 hole 3.2 paste-2539.97 mask+0: Un1(0,0)
PinHeader_1x02_P2.54mm_Vertical_SMD_Pin1Left [mm]
  rect 2.51x1 smd mask+0: 1(-1.655,1.27) 2(1.655,-1.27)
  silkscreen extent -2.85,-2.6 1.33,2.6
Power_Wire#1 [mm]
  round 8.2 hole 1.2 paste-2539.97 mask+0: 1(0,-12.192)
Power_Wire#2 [mm]
  round 5 hole 3.2 paste-2539.97 mask+0: 1(0,0)
Power_Wire#3 [mm]
  round 6 hole 3 paste-2539.97 mask+0: 1(-5.08,0)
Power_Wire#4 [mm]
  round 6 hole 3 paste-2539.97 mask+0: 1(4.445,0)
R_0805_2012Metric_Pad1.20x1.40mm_HandSolder [mm]
  rrect21% 1.2x1.4 smd mask+0: 1(-1,0) 2(1,0)
  silkscreen extent -0.23,-0.73 0.23,0.73
R_2512_6332Metric_Pad1.40x3.35mm_HandSolder [mm]
  rrect18% 1.4x3.35 smd mask+0: 1(-3.05,0) 2(3.05,0)
  silkscreen extent -2.18,-1.71 2.18,1.71

## Part data
C1 C2 C3 C4 C5 C6 C7 C8 C9 C10 C11 C12 C13 C14 C15 C16 C17 C18 C19 C20 C21 C22 C23 C24 C25 C26 C27 C28 C29 C30 C31 C32 C33 C34 C35 C36 C37 C38 C39 C40 C41 C42 C43: library part C_1210_3225Metric_Pad1.33x2.70mm_HandSolder, "Capacitor SMD 1210 (3225 Metric), square (rectangular) end terminal, IPC_7351 nominal with elongated pad for handsoldering. (Body size source: IPC-SM-782 page 76, https://www.pcb-3d.com/wordpress/wp-content/uploads/ipc-sm-782a_amendment_1_and_2.pdf), generated with kicad-footprint-generator", Sheetfile=Power.kicad_sch, Sheetname=Power, ki_description="Unpolarized capacitor, small symbol", ki_keywords="capacitor cap"
C44 C45: library part C_Disc_D7.5mm_W5.0mm_P7.50mm, "C, Disc series, Radial, pin pitch=7.50mm, , diameter*width=7.5*5.0mm^2, Capacitor, http://www.vishay.com/docs/28535/vy2series.pdf", Sheetfile=Polarity_Protection.kicad_sch, Sheetname=Polarity_Protection, ki_description="Unpolarized capacitor", ki_keywords="cap capacitor"
C46 C47 C48 C49 C50 C51: library part C_1206_3216Metric_Pad1.33x1.80mm_HandSolder, "Capacitor SMD 1206 (3216 Metric), square (rectangular) end terminal, IPC_7351 nominal with elongated pad for handsoldering. (Body size source: IPC-SM-782 page 76, https://www.pcb-3d.com/wordpress/wp-content/uploads/ipc-sm-782a_amendment_1_and_2.pdf), generated with kicad-footprint-generator", Sheetfile=Power.kicad_sch, Sheetname=Power, ki_description="Unpolarized capacitor, small symbol", ki_keywords="capacitor cap"
D1: library part D_SOD-123, "SOD-123", Sheetfile=Polarity_Protection.kicad_sch, Sheetname=Polarity_Protection, ki_description="Zener diode, small symbol", ki_keywords=diode
H1 H2: library part MountingHole_3.2mm_M3, "Mounting Hole 3.2mm, no annular, M3", Sheetfile=Connector.kicad_sch, Sheetname=Connector, ki_description="Mounting Hole without connection", ki_keywords="mounting hole"
J1 J2 J3 J4 J5 J6 J8: library part Power_Wire, ki_description="Generic connector, single row, 01x01, script generated (kicad-library-utils/schlib/autogen/connector/)", ki_keywords=connector
  J1 J2 J3 J4 J8: Sheetfile=Power.kicad_sch, Sheetname=Power
  J5 J6: Sheetfile=Polarity_Protection.kicad_sch, Sheetname=Polarity_Protection
J7 J9 J10 J11 J12 J13 J14 J15: library part PinHeader_1x02_P2.54mm_Vertical_SMD_Pin1Left, "surface-mounted straight pin header, 1x02, 2.54mm pitch, single row, style 1 (pin 1 left)", Sheetfile=Connector.kicad_sch, Sheetname=Connector, ki_description="Generic connector, single row, 01x02, script generated", ki_keywords=connector
Q1 Q2 Q3 Q4 Q5 Q6 Q7: library part IPTG007N06NM5ATMA1, "PG-HSOG-8-1"
  Q1 Q2 Q3 Q4 Q5 Q6: Sheetfile=Power.kicad_sch, Sheetname=Power, ki_description="0.115A Id, 60V Vds, N-Channel MOSFET, SOT-23", ki_keywords="N-Channel Switching MOSFET"
  Q7: Sheetfile=Polarity_Protection.kicad_sch, Sheetname=Polarity_Protection, ki_description="20V Vds, 1.5A Id, N-Channel MOSFET, SOT-323", ki_keywords="N-Channel MOSFET"
R1 R3: library part R_2512_6332Metric_Pad1.40x3.35mm_HandSolder, "Resistor SMD 2512 (6332 Metric), square (rectangular) end terminal, IPC_7351 nominal with elongated pad for handsoldering. (Body size source: IPC-SM-782 page 72, https://www.pcb-3d.com/wordpress/wp-content/uploads/ipc-sm-782a_amendment_1_and_2.pdf), generated with kicad-footprint-generator", Sheetfile=Power.kicad_sch, Sheetname=Power, ki_description=Resistor, ki_keywords="R res resistor"
R2: library part R_0805_2012Metric_Pad1.20x1.40mm_HandSolder, "Resistor SMD 0805 (2012 Metric), square (rectangular) end terminal, IPC_7351 nominal with elongated pad for handsoldering. (Body size source: IPC-SM-782 page 72, https://www.pcb-3d.com/wordpress/wp-content/uploads/ipc-sm-782a_amendment_1_and_2.pdf), generated with kicad-footprint-generator", Sheetfile=Polarity_Protection.kicad_sch, Sheetname=Polarity_Protection, ki_description="Resistor, small symbol", ki_keywords="R resistor"

## Via types
v1: diameter 0.8, hole 0.4, F.Cu to B.Cu, tented both sides, 347 vias